# Altium PCB BQ25504 piezo energy harvesting.PcbDoc
Units mil, origin at the board's own origin, x right, y up, seen from the top; angles counter-clockwise.
Board outline 1858 x 971 mil, 2 copper layers (Top Layer, Bottom Layer); 16 components, 13 nets, 51 pads, 5 vias.
Unrouted connection lines stored in the file: 38.
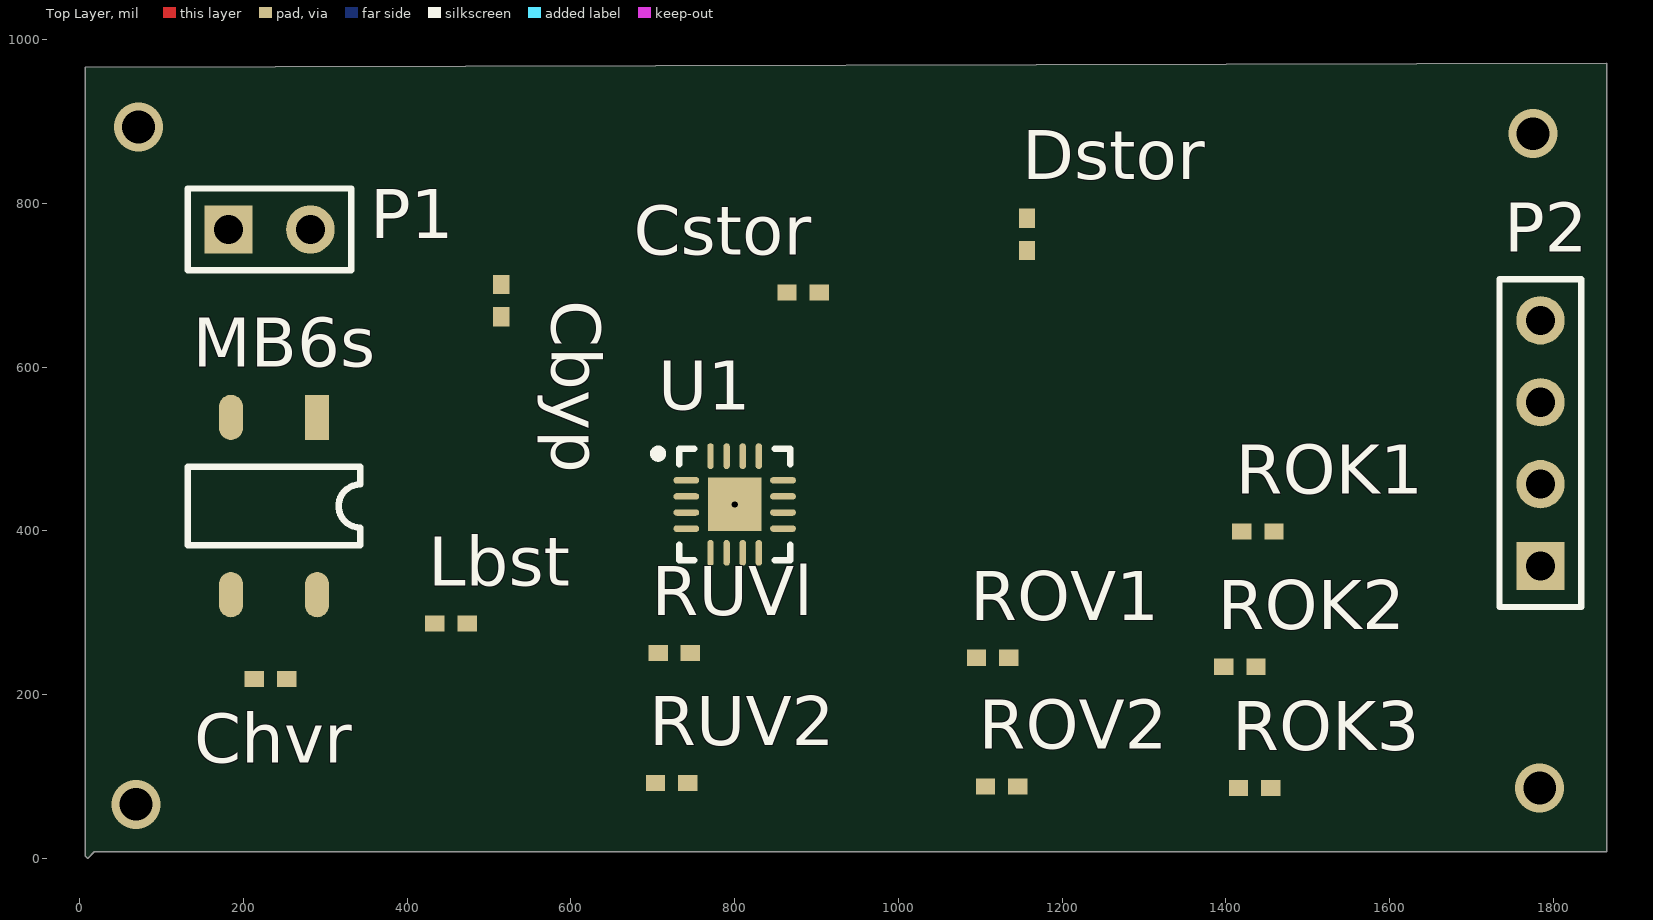
[diagram p0: Top Layer view]
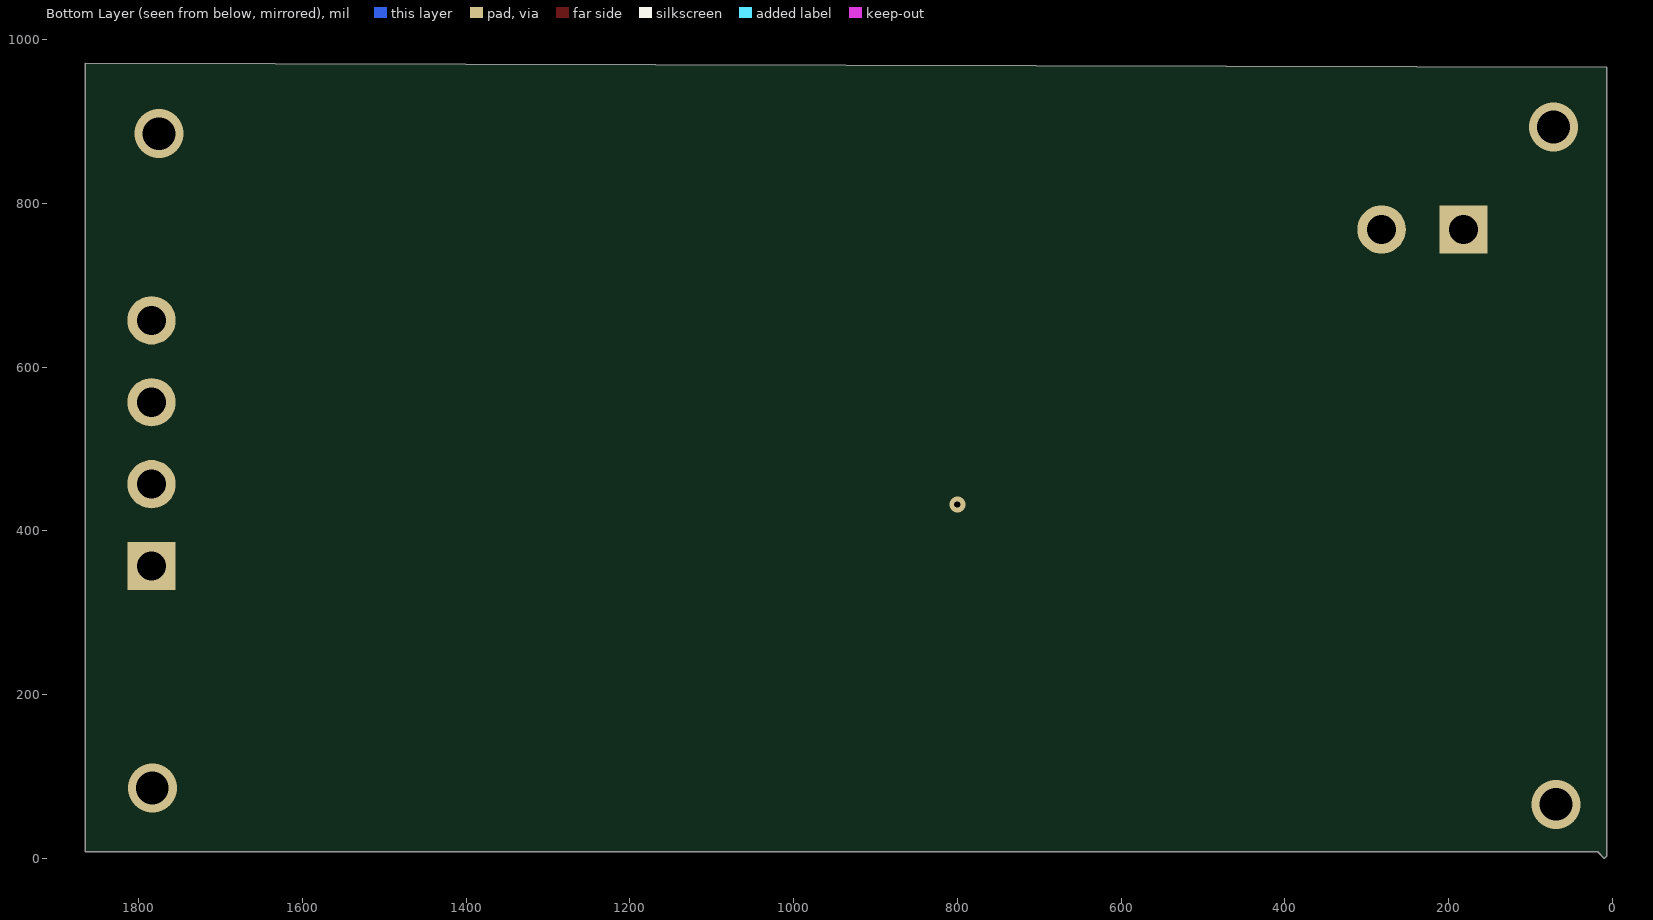
[diagram p1: Bottom Layer view, seen from below]

## Layer stack, top to bottom
Top Solder: solder mask 0.4, Solder Resist, Dk 3.5
Top Layer: signal copper 1.4
Dielectric1: dielectric 12.6, FR-4, Dk 4.8
Bottom Layer: signal copper 1.4
Bottom Solder: solder mask 0.4, Solder Resist, Dk 3.5

## Board outline
7,966 7,3 10,0 18,8 1865,8 1865,971

## Design rules (kind name [scope] priority, off if disabled: settings)
Clearance [All] p1: gap=10
PolygonConnect [All] p1: connectstyle=Relief reliefconductorwidth=10 reliefentries=4 polygonreliefangle="90 Angle" airgapwidth=10
RoutingVias [All] p1: holewidth=28 width=50 viastyle="Through Hole" minholewidth=28 minwidth=50 maxholewidth=28 maxwidth=50
SolderMaskExpansion [All] p1: expansion=4
Width [All] p1: maxlimit=10 minlimit=10 preferedwidth=10
30 further rules are at their usual default settings.

## Components (designator, comment, footprint, x,y, rotation, side; value= is the part's Value field where it differs from the comment)
Cbyp "Cap Semi" 0402 515,681 r270 top
Chvr "Cap Semi" 0402 233.31,219 r0 top
Cstor "Cap Semi" 0402 883.69,691 r0 top
Dstor "Diode" 0402 1157,762 r90 top
Lbst "Inductor" 0402 453.69,287 r180 top
MB6s "Bridge MB6s" MB6S 290.12,538.54 r270 top
P1 "Header 2" HDR1X2 182,768 r0 top
P2 "Header 4" HDR1X4 1784,357 r90 top
ROK1 "Res3" 0402 1439,399 r0 top
ROK2 "Res3" 0402 1417,234 r0 top
ROK3 "Res3" 0402 1435,86 r180 top
ROV1 "Res3" 0402 1115,245 r0 top
ROV2 "Res3" 0402 1126,88 r0 top
RUV2 "Res3" 0402 723,92 r180 top
RUVl "Res3" 0402 726.32,251 r180 top
U1 "BQ25504RGTT" BQ25504rgtt 800.06,432.16 r0 top

## Footprints (in the part's own frame and the unit in brackets; to place one, negate y for a bottom-side part, rotate by r counter-clockwise, add the part's x,y. Pads: shape width x height; smd on the part's side, far side on the other; paste and mask are expansions set on the pad)
0402 [mm] "Chip Capacitor, Body 1.0x0.5mm, IPC High Density"
  rect 0.6x0.5 smd: 1(-0.5,0) 2(0.5,0)
  body extent -0.55,-0.3 0.55,0.3, height 1.3
BQ25504rgtt [mm] "QFN, 16-Leads, Body 3.00x3.00mm, Pitch 0.50mm, Thermal Pad 1.66x1.66mm, IPC Medium Density"
  oval 0.8x0.2 smd: 1(-1.5,0.75) 2(-1.5,0.25) 3(-1.5,-0.25) 4(-1.5,-0.75) 9(1.5,-0.75) 10(1.5,-0.25) 11(1.5,0.25) 12(1.5,0.75)
  oval 0.2x0.8 smd: 5(-0.75,-1.5) 6(-0.25,-1.5) 7(0.25,-1.5) 8(0.75,-1.5) 13(0.75,1.5) 14(0.25,1.5) 15(-0.25,1.5) 16(-0.75,1.5)
  rect 1.66x1.66 smd: 17(0,0)
  silkscreen extent -2.5,-1.73 1.72,1.72, body extent -1.58,-1.58 1.58,1.58, height 1
HDR1X2 [mm] "Connector; Header; 2 Position"
  rect 1.5x1.5 hole 0.9: 1(0,0)
  round 1.5 hole 0.9: 2(2.54,0)
  silkscreen extent -1.27,-1.27 3.81,1.27
HDR1X4 [mm] "Connector; Header; 4 Position"
  rect 1.5x1.5 hole 0.9: 1(0,0)
  round 1.5 hole 0.9: 2(2.54,0) 3(5.08,0) 4(7.62,0)
  silkscreen extent -1.27,-1.27 8.89,1.27
MB6S [mm]
  rect 1.4x0.74 smd: 1(0,0)
  oval 1.4x0.74 smd: 2(0,-2.67) 3(5.5,-2.67) 4(5.5,0)
  silkscreen extent 1.54,-4 3.96,1.34

## Part data
Cbyp Chvr Cstor: "Capacitor (Semiconductor SIM Model)"
Dstor: "Default Diode"
P1: "Header, 2-Pin"
P2: "Header, 4-Pin"
ROK1 ROK2 ROK3 ROV1 ROV2 RUV2 RUVl: "Resistor"

## Via types
v1: diameter 60, hole 40, Top Layer to Bottom Layer, 4 vias
v2: diameter 19.68, hole 7.87, Top Layer to Bottom Layer, 1 vias

## Nets (pads, with @x,y where several pads share a name; then routed paths per layer and width w, separated by ;. In a path a pad name is that pad's centre, name@x,y a point inside that pad or via, vN(x,y) a via of type N, cw(c..) or ccw(c..) an arc to the next point about the centre after c; other vN are vias at no path point)
1: MB6s.1 P1.2
2: MB6s.2 P1.1
AVSS: Cbyp.2 Chvr.2 Cstor.2 Dstor.2 MB6s.4 P2.4 ROK1.2 ROV1.2 RUVl.2 U1.1 U1.4 U1.5 U1.12 U1.13 U1.17
  other v2: 800.06,432.16
INPUT: Chvr.1 Lbst.1 MB6s.3 U1.2
LBST: Lbst.2 U1.16
OKHYST: ROK2.1 ROK3.2 U1.9
OKPROG: ROK1.1 ROK2.2 U1.10
VBAT: P2.1 U1.14
VBAT_OK: Dstor.1 P2.3 U1.11
VBAT_OV: ROV1.1 ROV2.2 U1.6
VBAT_UV: RUV2.2 RUVl.1 U1.8
VRDIV: ROK3.1 ROV2.1 RUV2.1 U1.7
VSTOR: Cbyp.1 Cstor.1 P2.2 U1.3 U1.15
copper on no net:
  other v1: 69,66 1783,86 1775,885 72,893